# Altium PCB bldc-robot-main-board.PcbDoc
Units mm, origin at the board's own origin, x right, y up, seen from the top; angles counter-clockwise.
Board outline 50 x 35 mm, 2 copper layers (Top Layer, Bottom Layer), stack 1.571 mm thick; 44 components, 60 nets, 262 pads, 72 vias.
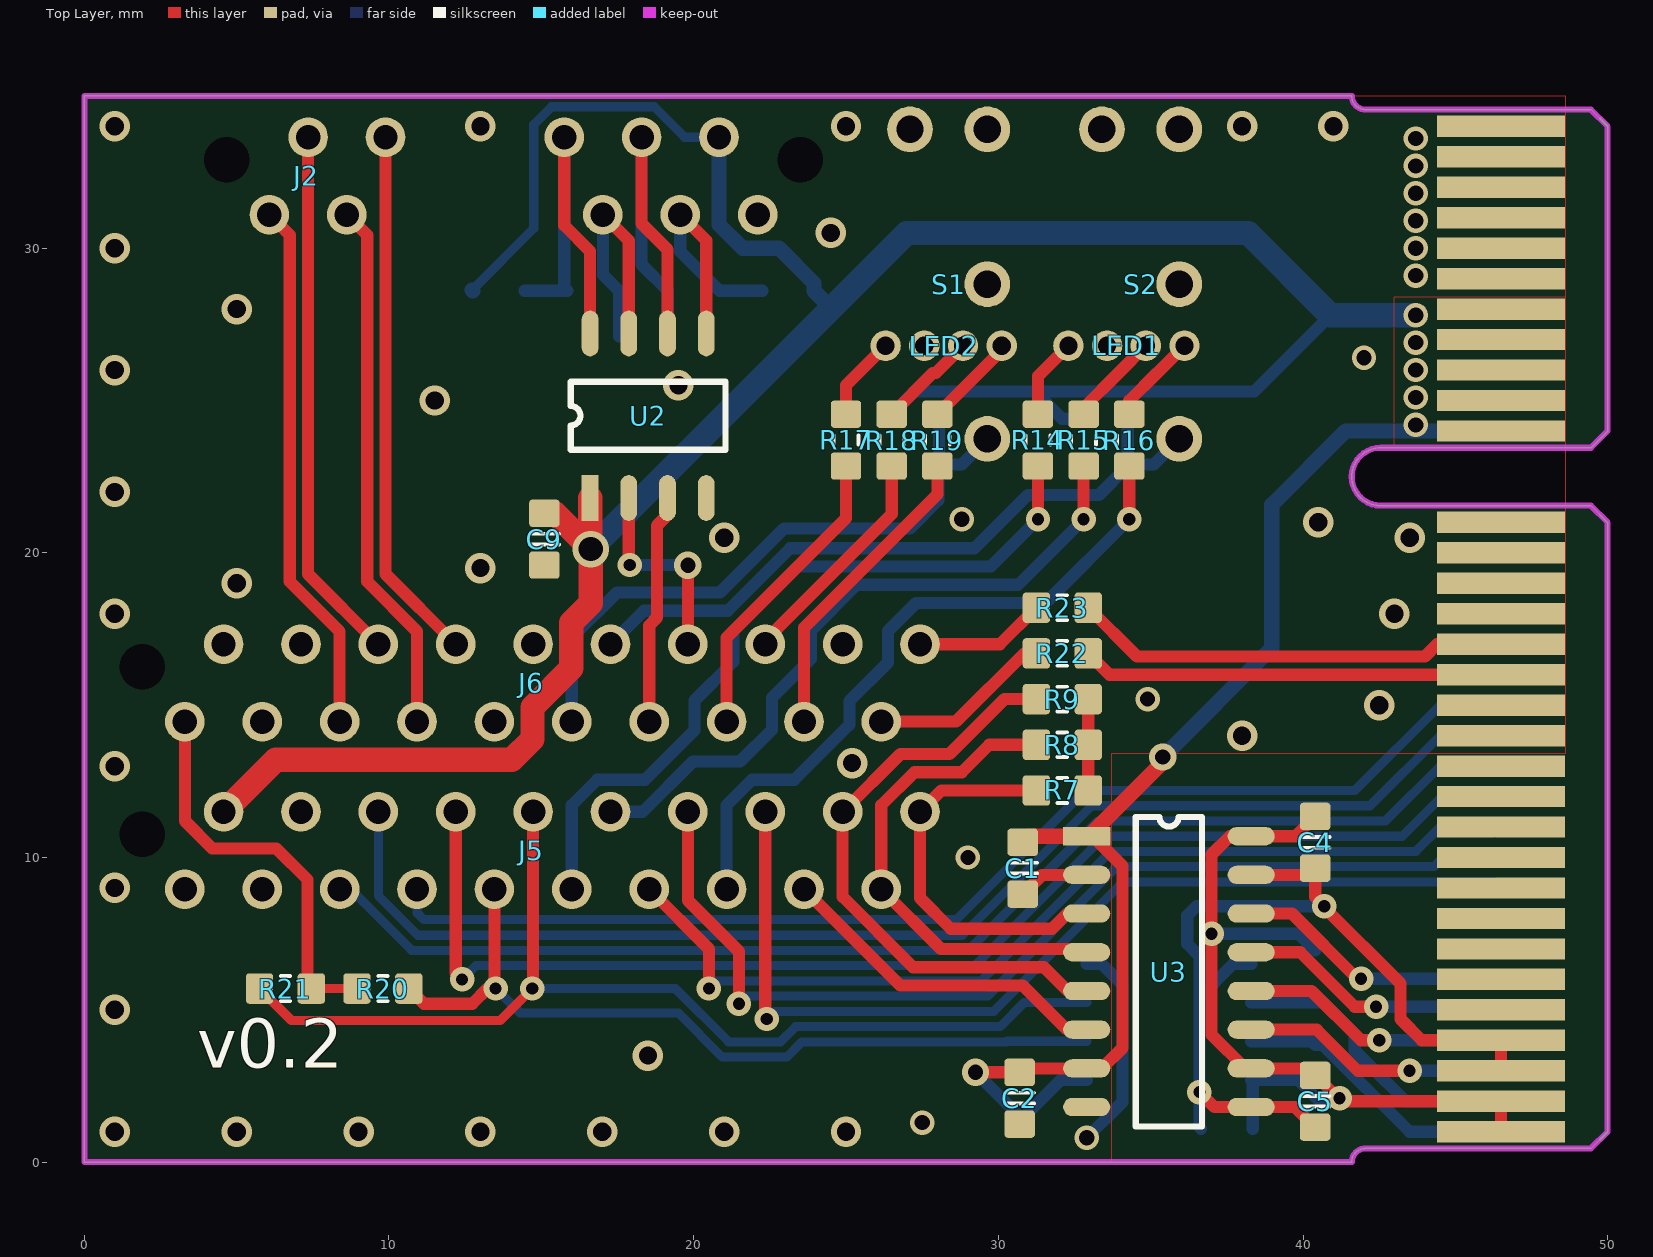
[diagram p0: Top Layer view]
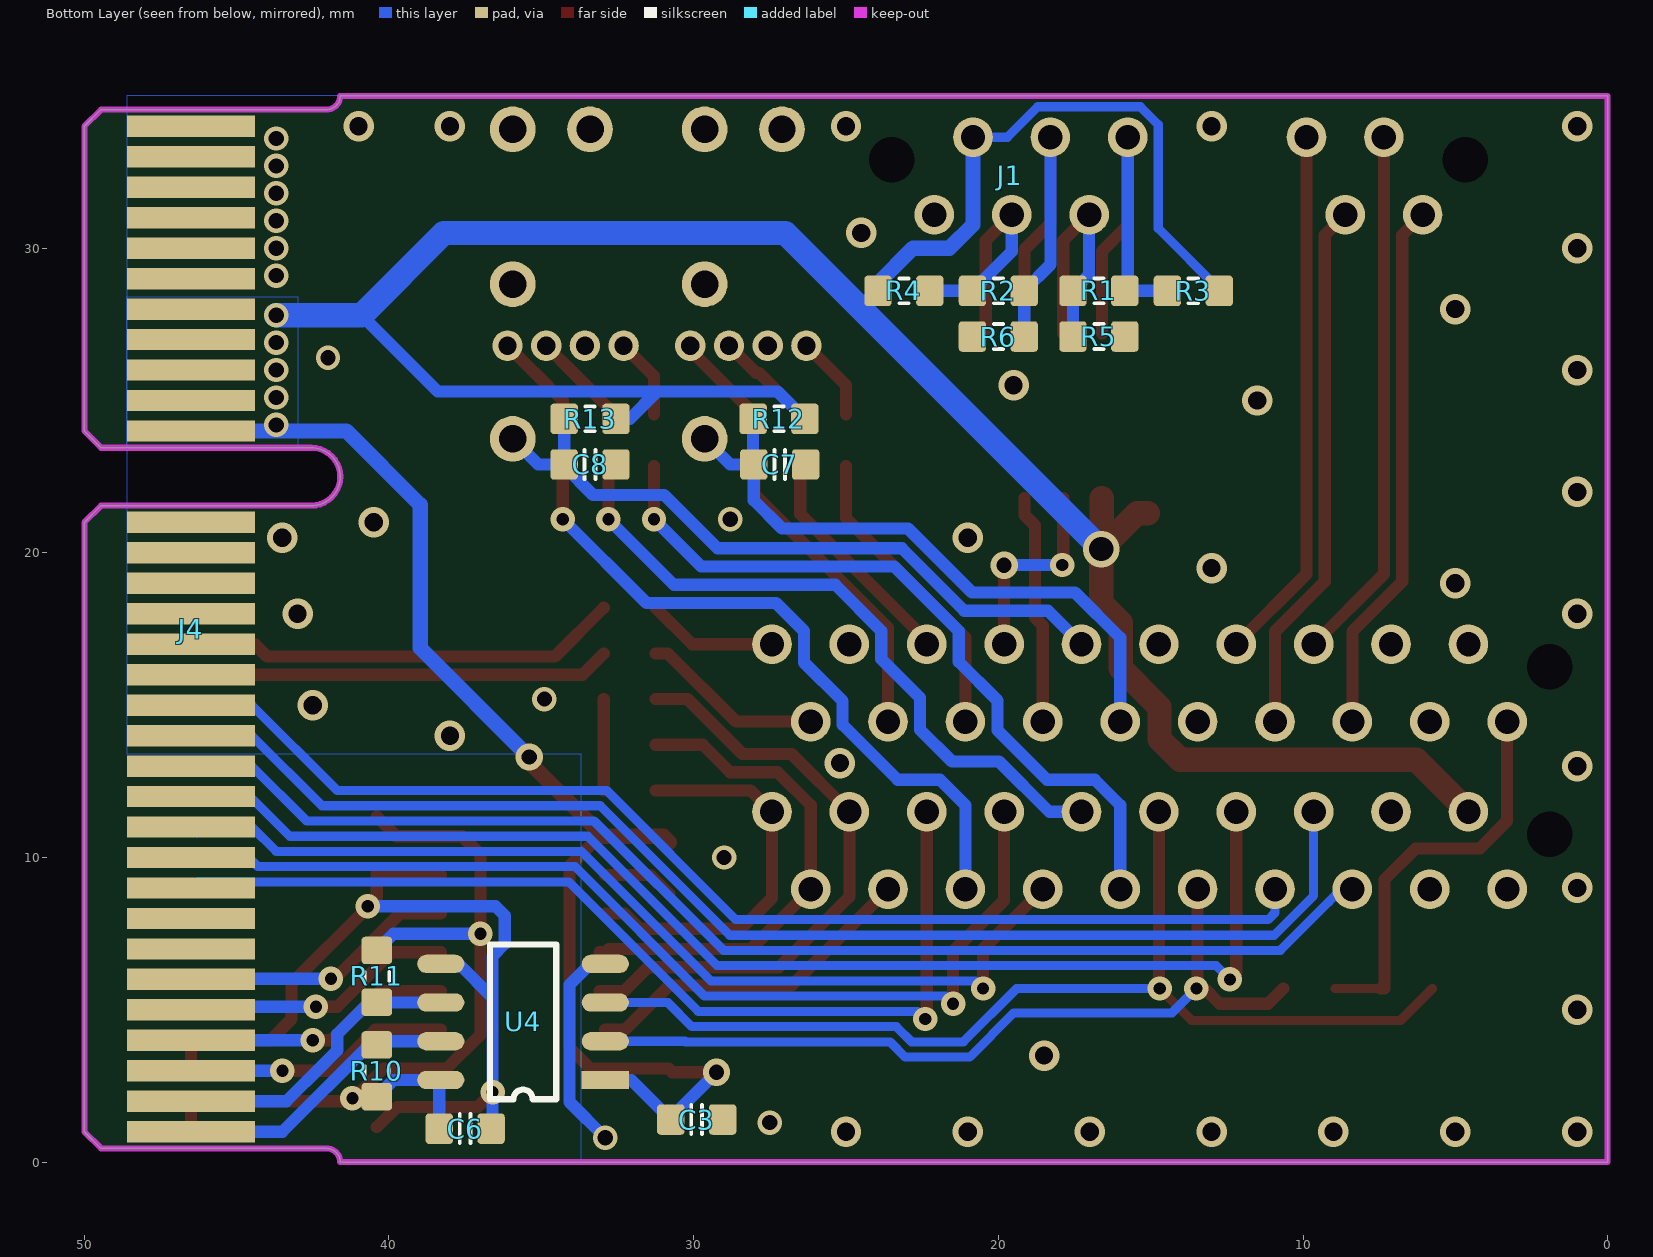
[diagram p1: Bottom Layer view, seen from below]
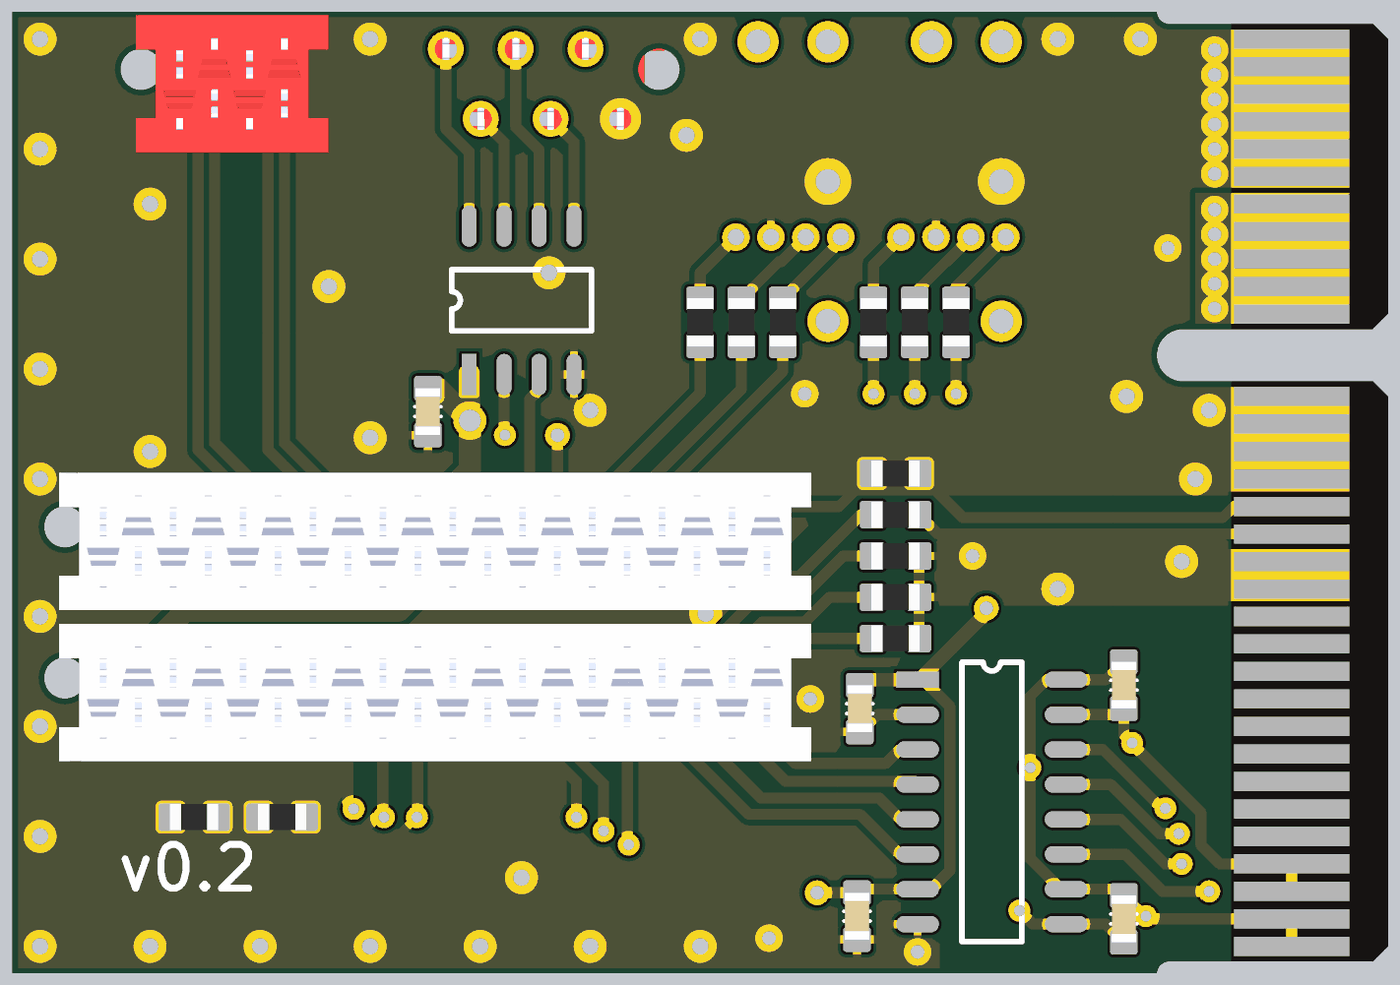
[diagram p2: 3D render of the assembled board from above, using the file's embedded part models]
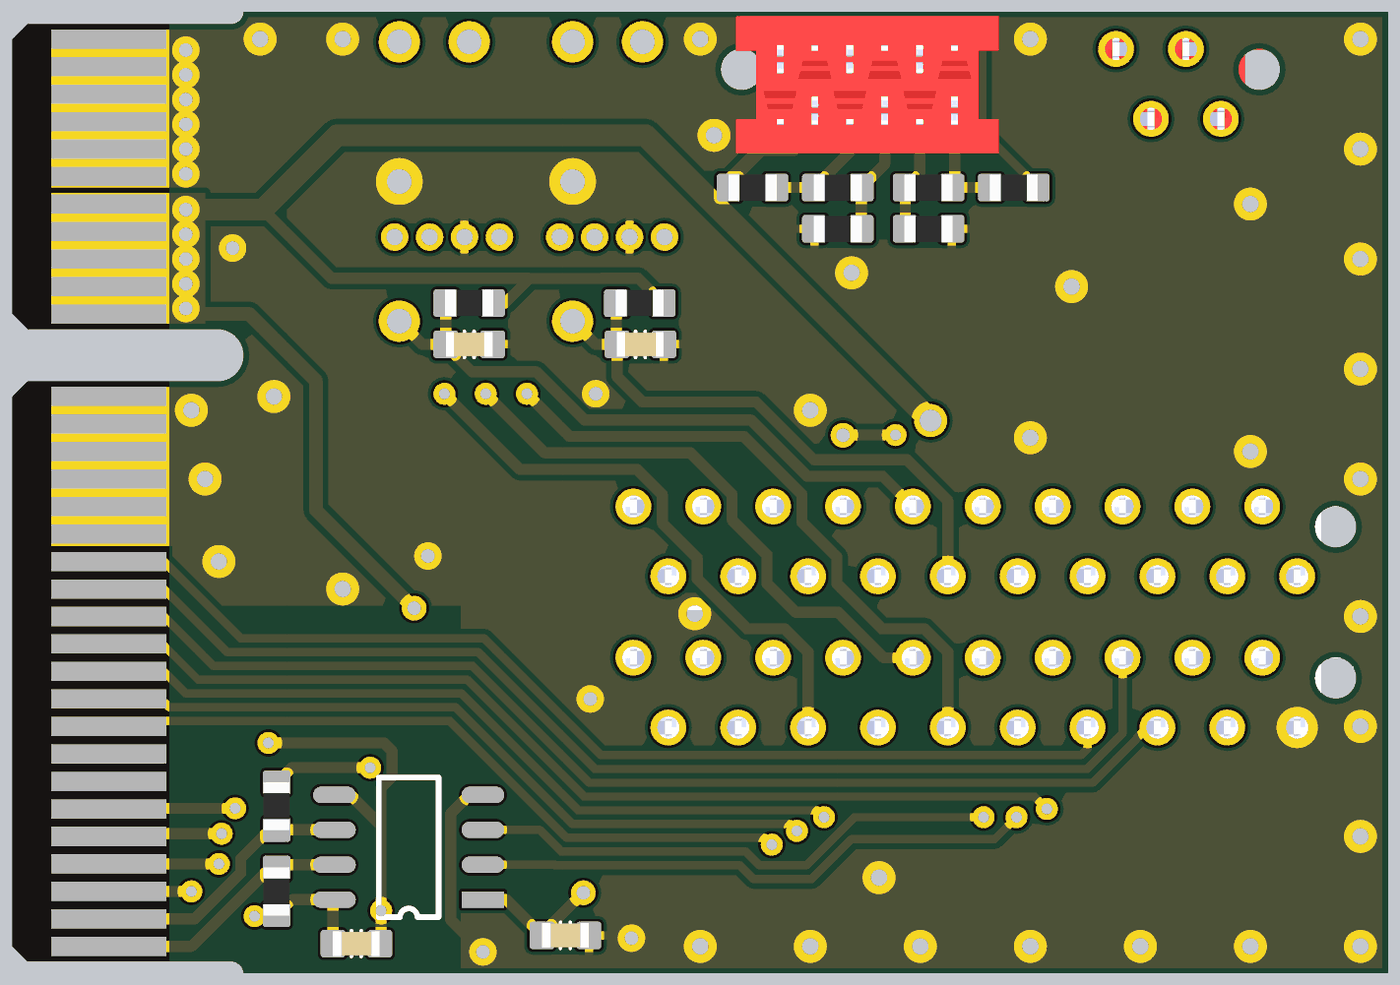
[diagram p3: 3D render of the assembled board from below, using the file's embedded part models]

## Layer stack, top to bottom
Top Solder: solder mask 0.0102, Solder Resist, Dk 3.5
Top Layer: signal copper 0.0356
Dielectric 1: dielectric 1.5, FR-4, Dk 4.8
Bottom Layer: signal copper 0.0356
Bottom Solder: solder mask 0.0102, Solder Resist, Dk 3.5

## Board outline
0,0 41.6,0 cw(c42.05,0) 42.05,0.45 49.45,0.45 50,1 50,21 49.45,21.55 42.55,21.55 cw(c42.55,22.5) 41.6,22.5 cw(c42.55,22.5) 42.55,23.45 49.45,23.45 50,24 50,34 49.45,34.55 42.05,34.55 cw(c42.05,35) 41.6,35 0,35

## Design rules (kind name [scope] priority, off if disabled: settings)
Clearance ClearanceKeepOut [All vs OnLayer('Keep-Out Layer')] p1: gap=0.1
Clearance [All] p2: gap=0.2
ComponentClearance ComponentClearanceIgnore [All vs InComponent('J4')] p1: gap=0 collisioncheckmode=3 verticalgap=0 showdistances=FALSE
ComponentClearance [All] p2: gap=0.2 collisioncheckmode=3 verticalgap=0.2 showdistances=FALSE
PolygonConnect PolygonConnectDirect [All vs IsVia or InComponent('J4') or InComponent('J5') or InComponent('J1') or InComponent('S1') or InComponent('S2')] p1: connectstyle=Direct reliefconductorwidth=0.3 reliefentries=4 polygonreliefangle="90 Angle" airgapwidth=0.3
PolygonConnect [All] p2: connectstyle=Relief reliefconductorwidth=0.3 reliefentries=4 polygonreliefangle="90 Angle" airgapwidth=0.2
RoomDefinition bldc-robot-main-board [InComponentClass('bldc-robot-main-board')] p1: confinementstyle=ConfineIn formatcopy=TRUE lockcomponents=FALSE outline -4.6,-4 91,-4 91,71 -4.6,71
RoutingVias [All] p1: holewidth=0.4 width=0.8 viastyle="Through Hole" minholewidth=0.3 minwidth=0.7 maxholewidth=3 maxwidth=5
SolderMaskExpansion SolderMaskExpansionVia [IsVia] p1: expansion=-1
SolderMaskExpansion [All] p2: expansion=0.1
Width [All] p1: maxlimit=5 minlimit=0.2 preferedwidth=0.3
29 further rules are at their usual default settings.

## Components (designator, comment, footprint, x,y, rotation, side; value= is the part's Value field where it differs from the comment)
C1 "100n" CAPC1608X90N 30.8,9.65 r270 top
C2 "100n" CAPC1608X90N 30.7,2.1 r90 top
C3 "100n" CAPC1608X90N 29.9,1.4 r0 bottom
C4 "100n" CAPC1608X90N 40.4,10.5 r90 top
C5 "100n" CAPC1608X90N 40.4,2 r270 top
C6 "100n" CAPC1608X90N 37.5,1.1 r180 bottom
C7 "100n" CAPC1608X90N 27.175,22.9 r180 bottom
C8 "100n" CAPC1608X90N 33.4,22.9 r180 bottom
C9 "100n" CAPC1608X90N 15.1,20.45 r270 top
J1 "RS485" MICRO-MATCH-6 22.1,31.1 r0 bottom
J2 "ETHERNET" MICRO-MATCH-4 6.075,31.1 r180 top
J4 "PCI-EXPRESS-X4" PCI-EXPRESS-X4-CARD-EDGE 46.5,34 r270 bottom
J5 "HEADER-20" MICRO-MATCH-20 3.3,8.96 r180 top
J6 "HEADER-20" MICRO-MATCH-20 3.3,14.46 r180 top
LED1 "RGB-LED-CC-2" RGB-LED-5mm 32.3,26.8 r0 top
LED2 "RGB-LED-CC-2" RGB-LED-5mm 26.3,26.8 r0 top
R1 "120R" RESC1608X55N 16.7,28.6 r0 bottom
R2 "120R" RESC1608X55N 20,28.6 r180 bottom
R3 "750R" RESC1608X55N 13.6,28.6 r0 bottom
R4 "750R" RESC1608X55N 23.1,28.6 r180 bottom
R5 "750R" RESC1608X55N 16.7,27.1 r180 bottom
R6 "750R" RESC1608X55N 20,27.1 r0 bottom
R7 "10k" RESC1608X55N 32.1,12.2 r180 top
R8 "10k" RESC1608X55N 32.1,13.7 r180 top
R9 "10k" RESC1608X55N 32.1,15.2 r180 top
R10 "2.2k" RESC1608X55N 40.4,3 r270 bottom
R11 "2.2k" RESC1608X55N 40.4,6.1 r90 bottom
R12 "10k" RESC1608X55N 27.2,24.4 r180 bottom
R13 "10k" RESC1608X55N 33.4,24.4 r180 bottom
R14 "1k" RESC1608X55N 31.3,23.7 r90 top
R15 "1k" RESC1608X55N 32.8,23.7 r90 top
R16 "1k" RESC1608X55N 34.3,23.7 r90 top
R17 "1k" RESC1608X55N 25,23.7 r90 top
R18 "1k" RESC1608X55N 26.5,23.7 r90 top
R19 "1k" RESC1608X55N 28,23.7 r90 top
R20 "2.2k" RESC1608X55N 9.8,5.7 r0 top
R21 "2.2k" RESC1608X55N 6.6,5.7 r180 top
R22 "1k" RESC1608X55N 32.1,16.7 r0 top
R23 "1k" RESC1608X55N 32.1,18.2 r0 top
S1 "SW-PB-OPEN" MC8US9R2A2M7RES 27.1,33.9 r270 top
S2 "SW-PB-OPEN" MC8US9R2A2M7RES 33.4,33.9 r270 top
U2 "SN75179B" SOIC-8 16.6,21.8 r90 top
U3 "SI8641" SOIC16 32.9,10.7 r0 top
U4 "SI8602" SOIC8 32.9,2.7 r0 bottom

## Footprints (in the part's own frame and the unit in brackets; to place one, negate y for a bottom-side part, rotate by r counter-clockwise, add the part's x,y. Pads: shape width x height; smd on the part's side, far side on the other; paste and mask are expansions set on the pad)
CAPC1608X90N [mm] "Chip Capacitor, Body 1.6x0.8mm, EIA 0603, IPC Medium Density"
  round 0.254 on Mech15: 0(0,0)
  rrect25% 0.9x1 smd: 1(-0.85,0) 2(0.85,0)
  Top Layer pour cut-out: -0.6,0.5 -0.4,0.7 0.4,0.7 0.6,0.5 0.6,-0.5 0.4,-0.7 -0.4,-0.7 -0.6,-0.5
  silkscreen extent -0.18,-0.48 0.18,0.48, body extent -0.85,-0.45 0.85,0.45, height 0.89
MC8US9R2A2M7RES [mm]
  round 1.5 hole 0.9 unplated: 0(0,2.54) 0(0,0) 4(10.16,2.54) 6(5.08,2.54)
  body extent -1.1,-1.4 4.7,3.9, height 7
MICRO-MATCH-4 [mm]
  round 1.3 hole 0.8: 1(0,0) 2(-1.27,-2.54) 3(-2.54,0) 4(-3.81,-2.54)
  round 0 hole 1.5 unplated: drill(1.4,-1.8)
  body extent -5.41,-3.77 1.6,1.23, height 4
MICRO-MATCH-6 [mm]
  round 1.3 hole 0.8: 1(0,0) 2(-1.27,-2.54) 3(-2.54,0) 4(-3.81,-2.54) 5(-5.08,0) 6(-6.35,-2.54)
  round 0 hole 1.5 unplated: drill(1.4,-1.8)
  body extent -7.95,-3.73 1.6,1.27, height 4
MICRO-MATCH-20 [mm]
  round 1.3 hole 0.8: 1(0,0) 2(-1.27,-2.54) 3(-2.54,0) 4(-3.81,-2.54) 5(-5.08,0) 6(-6.35,-2.54) 7(-7.62,0) 8(-8.89,-2.54)
  round 1.3 hole 0.8 unplated: 9(-10.16,0) 10(-11.43,-2.54) 11(-12.7,0) 12(-13.97,-2.54) 13(-15.24,0) 14(-16.51,-2.54) 15(-17.78,0) 16(-19.05,-2.54) 17(-20.32,0) 18(-21.59,-2.54) 19(-22.86,0) 20(-24.13,-2.54)
  round 0 hole 1.5 unplated: drill(1.4,-1.8)
  body extent -25.73,-3.77 1.6,1.23, height 4
PCI-EXPRESS-X4-CARD-EDGE [mm]
  rect 0.7x4.2 smd far side: A1(0,0) A2(1,0) A3(2,0) A4(3,0) A5(4,0) A6(5,0) A7(6,0) A8(7,0) A9(8,0) A10(9,0) A11(10,0) A12(13,0) A13(14,0) A14(15,0) A15(16,0) A16(17,0) A17(18,0) A18(19,0) A19(20,0) A20(21,0) A21(22,0) A22(23,0) A23(24,0) A24(25,0) A25(26,0) A26(27,0) A27(28,0) A28(29,0) A29(30,0) A30(31,0) A31(32,0) A32(33,0)
  rect 0.7x4.2 smd: B1(0,0) B2(1,0) B3(2,0) B4(3,0) B5(4,0) B6(5,0) B7(6,0) B8(7,0) B9(8,0) B10(9,0) B11(10,0) B12(13,0) B13(14,0) B14(15,0) B15(16,0) B16(17,0) B17(18,0) B18(19,0) B19(20,0) B20(21,0) B21(22,0) B22(23,0) B23(24,0) B24(25,0) B25(26,0) B26(27,0) B27(28,0) B28(29,0) B29(30,0) B30(31,0) B31(32,0) B32(33,0)
RESC1608X55N [mm] "Chip Resistor, Body 1.6x0.8mm, EIA 0603, IPC Medium Density"
  round 0.254 on Mech15: 0(0,0)
  rrect25% 0.9x1 smd: 1(-0.85,0) 2(0.85,0)
  Top Layer pour cut-out: -0.6,0.5 -0.4,0.7 0.4,0.7 0.6,0.5 0.6,-0.5 0.4,-0.7 -0.4,-0.7 -0.6,-0.5
  silkscreen extent -0.15,-0.41 0.15,0.41, body extent -0.87,-0.47 0.88,0.48, height 0.54
RGB-LED-5mm [mm]
  round 1 hole 0.6: 1(0,0) 2(1.27,0) 3(2.54,0) 4(3.81,0)
SOIC8 [mm]
  rect 1.55x0.6 smd: 1(0,0)
  oval 1.55x0.6 smd: 2(0,-1.27) 3(0,-2.54) 4(0,-3.81) 5(5.4,-3.81) 6(5.4,-2.54) 7(5.4,-1.27) 8(5.4,0)
  silkscreen extent 1.61,-4.44 3.79,0.64
SOIC16 [mm]
  rect 1.55x0.6 smd: 1(0,0)
  oval 1.55x0.6 smd: 2(0,-1.27) 3(0,-2.54) 4(0,-3.81) 5(0,-5.08) 6(0,-6.35) 7(0,-7.62) 8(0,-8.89) 9(5.4,-8.89) 10(5.4,-7.62) 11(5.4,-6.35) 12(5.4,-5.08) 13(5.4,-3.81) 14(5.4,-2.54) 15(5.4,-1.27) 16(5.4,0)
  silkscreen extent 1.61,-9.53 3.79,0.64
SOIC-8 [mm]
  rect 1.5x0.55 smd: 1(0,0)
  oval 1.5x0.55 smd: 2(0,-1.27) 3(0,-2.54) 4(0,-3.81) 5(5.4,-3.81) 6(5.4,-2.54) 7(5.4,-1.27) 8(5.4,0)
  silkscreen extent 1.58,-4.44 3.82,0.64

## Part data
C1 C2 C3 C4 C5 C6 C7 C8 C9: library part CAPC_100n_0603_X7R_50V_10%, "Capacitor SMD Cer 100nF 10% 50V X7R 0603"
J1: library part HEADER-6
J2: library part HEADER-4
R1 R2 R3 R4 R5 R6 R7 R8 R9 R10 R11 R12 R13 R14 R15 R16 R17 R18 R19 R20 R21 R22 R23: library part RES_120R_0603_5%, "Resistor SMD chip 120 Ohm 0.1W 5% 0603"

## Via types
v1: diameter 1, hole 0.6, Top Layer to Bottom Layer, 33 vias
v2: diameter 0.8, hole 0.4, Top Layer to Bottom Layer, 18 vias
v3: diameter 0.8, hole 0.5, Top Layer to Bottom Layer, 17 vias
v4: diameter 0.9, hole 0.5, Top Layer to Bottom Layer, 3 vias
v5: diameter 1.2, hole 0.8, Top Layer to Bottom Layer, 1 vias

## Nets (pads, with @x,y where several pads share a name; then routed paths per layer and width w, separated by ;. In a path a pad name is that pad's centre, name@x,y a point inside that pad or via, vN(x,y) a via of type N, cw(c..) or ccw(c..) an arc to the next point about the centre after c; other vN are vias at no path point)
3.3V: J6.1 R20.1 R21.1 | length 13.3
  Top Layer w0.3: R21.1 R20.1
  Top Layer w0.4: J6.1 3.3,11.2 4.2,10.3 6.3,10.3 7.33,9.27 7.33,5.7 R21.1
5V: C1.1 C2.2 C3.2 C9.1 J1.2 J4.A7 J4.A8 J4.A9 J4.A10 J4.A11 J4.B7 J4.B8 J4.B9 J4.B10 J4.B11 J5.2 R3.1 R4.1 R12.2 R13.2 U2.1 U3.1 U3.7 U4.1 | length 134.5
  Top Layer w0.4: v4(29.25,2.95) C2.2 30.83,3.08 U3.7 33.405,3.08 34.075,3.75 34.075,9.72 33.095,10.7 32.97,10.7 U3.1
  Top Layer w0.5: C1.1 31,10.7 U3.1 ; U3.1@32.97,10.7 35.4,13.13 v4(35.4,13.3)
  Top Layer w0.8: J5.2 6.28,13.21 7.125,13.21 14.035,13.21 14.71,13.885 14.71,14.938 15.98,16.208 15.98,17.705 16.625,18.35 v5(16.625,20.125) v5@16.6,20.15 ; C9.1 15.45,21.3 v5@16.6,20.15 ; U2.1 v5@16.6,20.15
  Bottom Layer w0.3: R3.1@12.725,28.625 14.75,30.65 14.75,34.054 15.336,34.64 18.704,34.64 19.704,33.64 J1.2
  Bottom Layer w0.4: R12.2 27.25,25.3 28.6,25.3 28.608,25.292 31.2,25.292 ; v4(29.25,2.95) 30.75,1.45 C3.2 32.05,2.7 U4.1 ; R13.2 32.092,24.4 31.2,25.292 ; 40.9,27.8 38.4,25.3 31.208,25.3 31.2,25.292
  Bottom Layer w0.5: R3.1@12.725,28.625 R3.1 ; J1.2 20.83,30.77 21.6,30 22.8,30 23.95,28.85 R4.1 24.525,28.025 ; v4(35.4,13.3) 38.975,16.875 38.975,21.575 41.4,24 J4.B11
  Bottom Layer w0.8: v5(16.625,20.125) 24.525,28.025 27,30.5 38.2,30.5 40.9,27.8 v3(43.7,27.8)
  other v3: 43.7,24.2 43.7,25.1 43.7,26 43.7,26.9
5V_COIL: C4.2 C5.1 C6.1 J4.A31 J4.A32 R10.2 R11.2 U3.10 U3.16 U4.8 | length 29.6
  Top Layer w0.4: C4.2 39.75,10.7 U3.16 37.6,10.7 37,10.1 v2(37,7.5) 37,4.185 38.105,3.08 U3.10 40.17,3.08 C5.1 41.25,2 41.75,2 ; 41.8,2 J4.A31 J4.A32
  Bottom Layer w0.4: v2(37,7.5) 39.85,7.5 R11.2 ; C6.1 38.35,2.65 U4.8 39.85,2.7 R10.2 40.45,2.1 v2(41.2,2.1)
A: J1.6 R1.1 R3.2 U2.8 | length 13.3
  Top Layer w0.4: J1.6 15.75,30.75 16.6,29.9 U2.8
  Bottom Layer w0.4: R3.2 R1.1 15.75,28.7 J1.6
B: J1.5 R1.2 R5.1 U2.7 | length 8.5
  Top Layer w0.4: J1.5 17.87,30.25 U2.7
  Bottom Layer w0.4: J1.5 17.02,29.13 R1.2 R5.1
BALL_SENS: J4.B24 J5.16 | length 32.9
  Top Layer w0.3: J5.16 J5.16@22.4,11.45
  Top Layer w0.4: J5.16 22.35,4.75 v2(22.4,4.7)
  Bottom Layer w0.3: v2(22.4,4.7) 22.65,4.95 29.85,4.95 34.1,9.2 46.3,9.2 J4.B24
BTN1: C7.1 J6.11 R12.1 S1.4 | length 21.5
  Bottom Layer w0.4: J6.11@16.215,14.46 J6.11 16,17.215 17.485,18.7 20.868,18.7 22.968,20.8 27.1,20.8 28.025,21.725 C7.1 ; R12.1@28.015,24.4 R12.1@28.025,24.4 ; R12.1 28.05,22.925 C7.1 ; S1.4 28.8,22.9 C7.1
BTN2: C8.1 J6.12 R13.1 S2.4 | length 23
  Bottom Layer w0.4: J6.12 18.37,18.1 21.117,18.1 23.167,20.15 29.219,20.15 30.969,21.9 33.3,21.9 34.25,22.85 C8.1 ; R13.1 C8.1 ; S2.4 35.1,22.9 C8.1
CHARGE: J5.18 R9.2 U3.5 | length 20.2
  Top Layer w0.4: R9.2 30.2,15.2 28.4,13.4 26.79,13.4 J5.18 24.89,8.71 27.2,6.4 31.5,6.4 32.28,5.62 U3.5 U3.5@33.095,5.62
CHARGE_COIL: J4.B29 U3.12 | length 8.9
  Top Layer w0.4: U3.12 40.28,5.62 41.9,4 v2(42.5,4)
  Bottom Layer w0.4: v2(42.5,4) J4.B29
CS: J4.B21 J5.8 | length 42.3
  Top Layer w0.3: J5.8@12.1,11.41 J5.8
  Top Layer w0.4: J5.8 12.19,6.21 v2(12.4,6)
  Bottom Layer w0.3: v2(12.4,6) 12.85,6.45 20.982,6.45 22.418,6.45 29.229,6.45 33.479,10.7 43.255,10.7 44.555,12 J4.B21
DONE: J5.17 U3.6 | length 11.2
  Top Layer w0.4: J5.17 26.78,5.8 30.8,5.8 32.25,4.35 U3.6
DONE_COIL: J4.B30 U3.11 | length 8.8
  Top Layer w0.4: U3.11 40.45,4.35 41.8,3 v2(43.5,3)
  Bottom Layer w0.4: v2(43.5,3) J4.B30
GND: C1.2 C2.1 C3.1 C7.2 C8.2 C9.2 J1.1 J4.A1 J4.A2 J4.A3 J4.A4 J4.A5 J4.A6 J4.A12 J4.A13 J4.A14 J4.A15 J4.A18 J4.A19 J4.B1 J4.B2 J4.B3 J4.B4 J4.B5 J4.B6 J4.B12 J4.B13 J4.B14 J4.B15 J4.B16 J4.B17 J5.1 LED1.2 LED2.2 R5.2 R6.2 R7.1 R8.1 R9.1 S1.6 S2.6 U2.4 U3.2 U3.8 U4.4 | length 12.3
  Top Layer w0.4: C1.2 31.43,9.43 U3.2 ; R7.1 R8.1 R9.1
  Bottom Layer w0.4: v3(32.9,0.8) 34.075,1.975 34.075,5.825 33.39,6.51 U4.4
  other v1: 1,1 5,1 9,1 13,1 17,1 21,1 25,1 18.5,3.5 1,5 1,9 1,13 25.2,13.1 38,14 42.5,15 1,18 43,18 5,19 13,19.5 21,20.5 43.5,20.5 40.5,21 1,22 11.5,25 19.5,25.5 1,26 5,28 1,30 24.5,30.5 1,34 13,34 25,34 38,34 41,34
  other v3: 27.5,1.3 29,10 34.9,15.2 28.8,21.1 42,26.4 43.7,29.1 43.7,30 43.7,30.9 43.7,31.8 43.7,32.7 43.7,33.6
GND_COIL: C4.1 C5.2 C6.2 J4.A29 J4.A30 U3.9 U3.15 U4.5 | length 31.1
  Top Layer w0.4: v2(36.6,2.3) 37.09,1.81 U3.9 39.74,1.81 C5.2 ; U3.15 40.18,9.43 C4.1 40.4,8.7 v2(40.7,8.4) 40.7,8.363 43.2,5.863 43.2,4.7 43.9,4 J4.A29 J4.A30
  Bottom Layer w0.4: C6.2 36.6,1.15 v2(36.6,2.3) 36.6,5.4 ; U4.5 37.71,6.51 36.6,5.4 ; v2(40.7,8.4) 36.5,8.4 36.2,8.1 36.2,7.831 36.2,7.169 36.6,6.769 36.6,5.4
KICK1: J5.20 R7.2 U3.3 | length 13
  Top Layer w0.4: R7.2 28.13,12.2 J5.20 27.43,8.67 28.44,7.66 31.76,7.66 32.26,8.16 U3.3
KICK1_COIL: J4.B27 U3.14 | length 9.1
  Top Layer w0.4: U3.14 39.64,8.16 41.777,6.023 v2(41.909,6.023)
  Bottom Layer w0.4: v2(41.909,6.023) J4.B27@46.5,6.023
KICK2: J5.19 R8.2 U3.4 | length 16.3
  Top Layer w0.4: R8.2 29.7,13.7 28.8,12.8 27.245,12.8 26.16,11.715 J5.19 28.12,7 U3.4@32.79,7 ; U3.4 U3.4@33.095,6.89
KICK2_COIL: J4.B28 U3.13 | length 9.1
  Top Layer w0.4: U3.13 39.91,6.89 41.7,5.1 v2(42.4,5.1)
  Bottom Layer w0.4: v2(42.4,5.1) 46.2,5.1 46.4,4.9 J4.B28
LED1B: J5.12 R15.1 | length 22.4
  Top Layer w0.4: v2(32.8,21.1) R15.1
  Bottom Layer w0.4: J5.12 18.325,11.5 19.975,13.15 21.525,13.15 22.57,14.195 22.57,15.245 23.84,16.515 23.84,17.435 25.355,18.95 30.65,18.95 v2(32.8,21.1)
LED1G: J5.15 R16.1 | length 22.7
  Top Layer w0.4: v2(34.3,21.1) R16.1
  Bottom Layer w0.4: J5.15 21.08,11.715 21.915,12.55 23.3,12.55 25.11,14.36 25.11,15.135 26.38,16.405 26.38,17.435 27.295,18.35 31.55,18.35 v2(34.3,21.1)
LED1R: J5.11 R14.1 | length 24.9
  Top Layer w0.4: v2(31.3,21.1) R14.1
  Bottom Layer w0.4: J5.11 16,11.715 16.835,12.55 18.4,12.55 20.03,14.18 20.03,15.155 21.3,16.425 21.3,17.435 23.415,19.55 29.75,19.55 v2(31.3,21.1)
LED2B: J6.16 R18.1 | length 7.6
  Top Layer w0.4: J6.16 22.35,17.124 26.5,21.274 R18.1
LED2G: J6.17 R19.1 | length 10.2
  Top Layer w0.4: J6.17 23.62,17.545 28,21.925 R19.1
LED2R: J6.15 R17.1 | length 10
  Top Layer w0.4: J6.15 21.08,17.215 25,21.135 R17.1
MBED_D+: J6.10
MBED_D-: J6.9
MBED_IF+: J6.4
MBED_IF-: J6.3
MBED_NR: J5.4
MBED_P23: J6.18
MBED_VB: J5.3
MBED_VU: J6.2
NetJ6_19: J6.19 R22.1 | length 6
  Top Layer w0.4: J6.19 28.611,14.46 30.851,16.7 R22.1
NetJ6_20: J6.20 R23.1 | length 4.3
  Top Layer w0.4: J6.20 30.05,17 R23.1
NetLED1_1: LED1.1 R14.2 | length 2.7
  Top Layer w0.4: R14.2 31.3,25.8 LED1.1
NetLED1_3: LED1.3 R15.2 | length 3.1
  Top Layer w0.4: R15.2 32.8,24.76 33.94,25.9 33.943,25.9 34.84,26.797 LED1.3
NetLED1_4: LED1.4 R16.2 | length 3
  Top Layer w0.4: R16.2 34.3,24.99 35.21,25.9 35.213,25.9 36.11,26.797 LED1.4
NetLED2_1: LED2.1 R17.2 | length 2.8
  Top Layer w0.4: R17.2 25,25.5 LED2.1
NetLED2_3: LED2.3 R18.2 | length 3.3
  Top Layer w0.4: R18.2 27.85,25.9 27.943,25.9 28.84,26.797 LED2.3
NetLED2_4: LED2.4 R19.2 | length 3.1
  Top Layer w0.4: R19.2 30.11,26.66 LED2.4
RD+: J2.2 J6.6 | length 17.6
  Top Layer w0.4: J2.2 7.345,19.305 J6.6
RD-: J2.1 J6.5 | length 17.6
  Top Layer w0.4: J2.1 6.745,30.43 6.745,19.056 8.38,17.421 J6.5
RX_ERF: J4.B23 J5.14 | length 34
  Top Layer w0.3: J5.14@19.8,11.49 J5.14
  Top Layer w0.4: J5.14 19.81,8.59 21.486,6.914 v2(21.486,5.2)
  Bottom Layer w0.3: v2(21.486,5.2) 21.736,5.45 29.643,5.45 33.893,9.7 44.3,9.7 44.6,10 J4.B23
RX_RS485: J6.14 U2.2 | length 6.7
  Top Layer w0.4: v2@17.87,19.6 U2.2 ; J6.14 v4(19.81,19.59)
  Bottom Layer w0.4: v2(17.9,19.6) 19.8,19.6 v4(19.81,19.59)
SCL2: J5.10 R21.2 U4.3 | length 35.1
  Top Layer w0.3: R21.2 6.8,4.65 13.65,4.65 v2(14.7,5.7)
  Top Layer w0.4: v2(14.7,5.7) 14.73,5.73 J5.10
  Bottom Layer w0.3: v2(14.7,5.7) 19.4,5.7 21.15,3.95 22.85,3.95 23.35,4.45 30.057,4.45 30.847,5.24 U4.3
SCL2_COIL: J4.B31 R11.1 U4.6 | length 9.9
  Bottom Layer w0.4: U4.6 40.39,5.24 R11.1 40.65,5.25 41.7,4.2 41.7,3.669 42.169,3.2 43.369,2 J4.B31
SCLK: J4.B18 J5.7 | length 39.4
  Bottom Layer w0.3: J5.7 10.92,8.187 11.147,7.96 28.617,7.96 32.857,12.2 41.7,12.2 44.5,15 J4.B18
SDA2: J5.9 R20.2 U4.2 | length 26.9
  Top Layer w0.4: R20.2 11.15,5.2 12.731,5.2 v2@13.231,5.7 ; v2@13.46,5.74 J5.9
  Bottom Layer w0.3: v2@13.639,5.7 v2(13.5,5.7) 14.3,4.9 19.493,4.9 20.943,3.45 23.057,3.45 23.557,3.95 30.264,3.95 30.284,3.97 U4.2
SDA2_COIL: J4.B32 R10.1 U4.7 | length 9.4
  Bottom Layer w0.4: U4.7 40.28,3.97 R10.1 40.65,3.85 43.5,1 J4.B32
SDI: J4.B20 J5.5 | length 41.5
  Bottom Layer w0.3: J5.5 8.74,8.96 9.15,8.55 9.15,8.543 10.743,6.95 20.775,6.95 22.625,6.95 29.022,6.95 33.272,11.2 42.7,11.2 44.5,13 J4.B20
SDO: J4.B19 J5.6 | length 42.9
  Bottom Layer w0.3: J5.6 9.65,8.75 10.95,7.45 20.568,7.45 22.832,7.45 28.814,7.45 33.064,11.7 42.2,11.7 44.5,14 J4.B19
SERVO1: J4.A16 R23.2 | length 14.4
  Top Layer w0.4: R23.2 34.55,16.6 44,16.6 44.4,17 J4.A16
SERVO2: J4.A17 R22.2 | length 13.8
  Top Layer w0.4: R22.2 33.65,16 J4.A17
TD+: J2.4 J6.8 | length 17.6
  Top Layer w0.4: J2.4 9.885,19.305 J6.8
TD-: J2.3 J6.7 | length 17.6
  Top Layer w0.4: J2.3 9.285,30.43 9.285,19.056 10.92,17.421 J6.7
TX_ERF: J4.B22 J5.13 | length 32.6
  Top Layer w0.4: J5.13 20.5,7 v2(20.5,5.7)
  Bottom Layer w0.3: v2(20.5,5.7) 20.75,5.95 29.436,5.95 33.686,10.2 43.7,10.2 44.5,11 J4.B22 J4.B22@46.3,10.8
TX_RS485: J6.13 U2.3 | length 7.6
  Top Layer w0.4: J6.13 18.54,17.615 18.8,17.875 18.8,20.9 19.14,21.24 U2.3
Y: J1.3 R2.1 R4.2 U2.5 | length 8.7
  Top Layer w0.4: J1.3 20.41,30.25 U2.5
  Bottom Layer w0.4: J1.3 19.56,29.89 R2.1 R4.2
Z: J1.4 R2.2 R6.1 U2.6 | length 13.7
  Top Layer w0.4: J1.4 18.29,30.81 19.14,29.96 U2.6
  Bottom Layer w0.4: J1.4 18.29,29.46 R2.2 R6.1
pads on no net: C1.0 C2.0 C3.0 C4.0 C5.0 C6.0 C7.0 C8.0 C9.0 J1.drill J2.drill J4.A20 J4.A21 J4.A22 J4.A23 J4.A24 J4.A25 J4.A26 J4.A27 J4.A28 J4.B25 J4.B26 J5.drill J6.drill R1.0 R2.0 R3.0 R4.0 R5.0 R6.0 R7.0 R8.0 R9.0 R10.0 R11.0 R12.0 R13.0 R14.0 R15.0 R16.0 R17.0 R18.0 R19.0 R20.0 R21.0 R22.0 R23.0 S1.0 S2.0

## Polygon pours and split planes (outlines as drawn)
5V on Top Layer "Top Layer-No Net" (solid, remove dead copper, shelved, pour order 5): 48.6,28.4 48.6,23.45 43,23.45 43,28.4
GND on Top Layer "Top Layer-No Net 1" (solid, remove dead copper, shelved, pour order 7): 0,0 0,35 48.6,35 48.6,13.4 33.7,13.4 33.7,0
5V on Bottom Layer "Top Layer-No Net" (solid, remove dead copper, shelved, pour order 6): 48.6,28.4 43,28.4 43,23.45 48.6,23.45
GND on Bottom Layer "Top Layer-No Net 1" (solid, remove dead copper, shelved, pour order 8): 0,0 0,35 48.6,35 48.6,13.4 33.7,13.4 33.7,0

## Keep-outs
Keep-Out Layer:
  the board outline again, w0.2

## Silkscreen, mask and mechanical layers (free items; w line width, h text height)
Top Overlay:
  text "v0.2" at 3.7,3.1 h1.6